# Altium PCB Prog_Adaptor.PcbDoc
Units mm, origin at the board's own origin, x right, y up, seen from the top; angles counter-clockwise.
Board outline 57.7 x 32.75 mm, 2 copper layers (Top Layer, Bottom Layer), stack 1.591 mm thick; 8 components, 10 nets, 55 pads, 15 vias.
Unrouted connection lines stored in the file: 3.
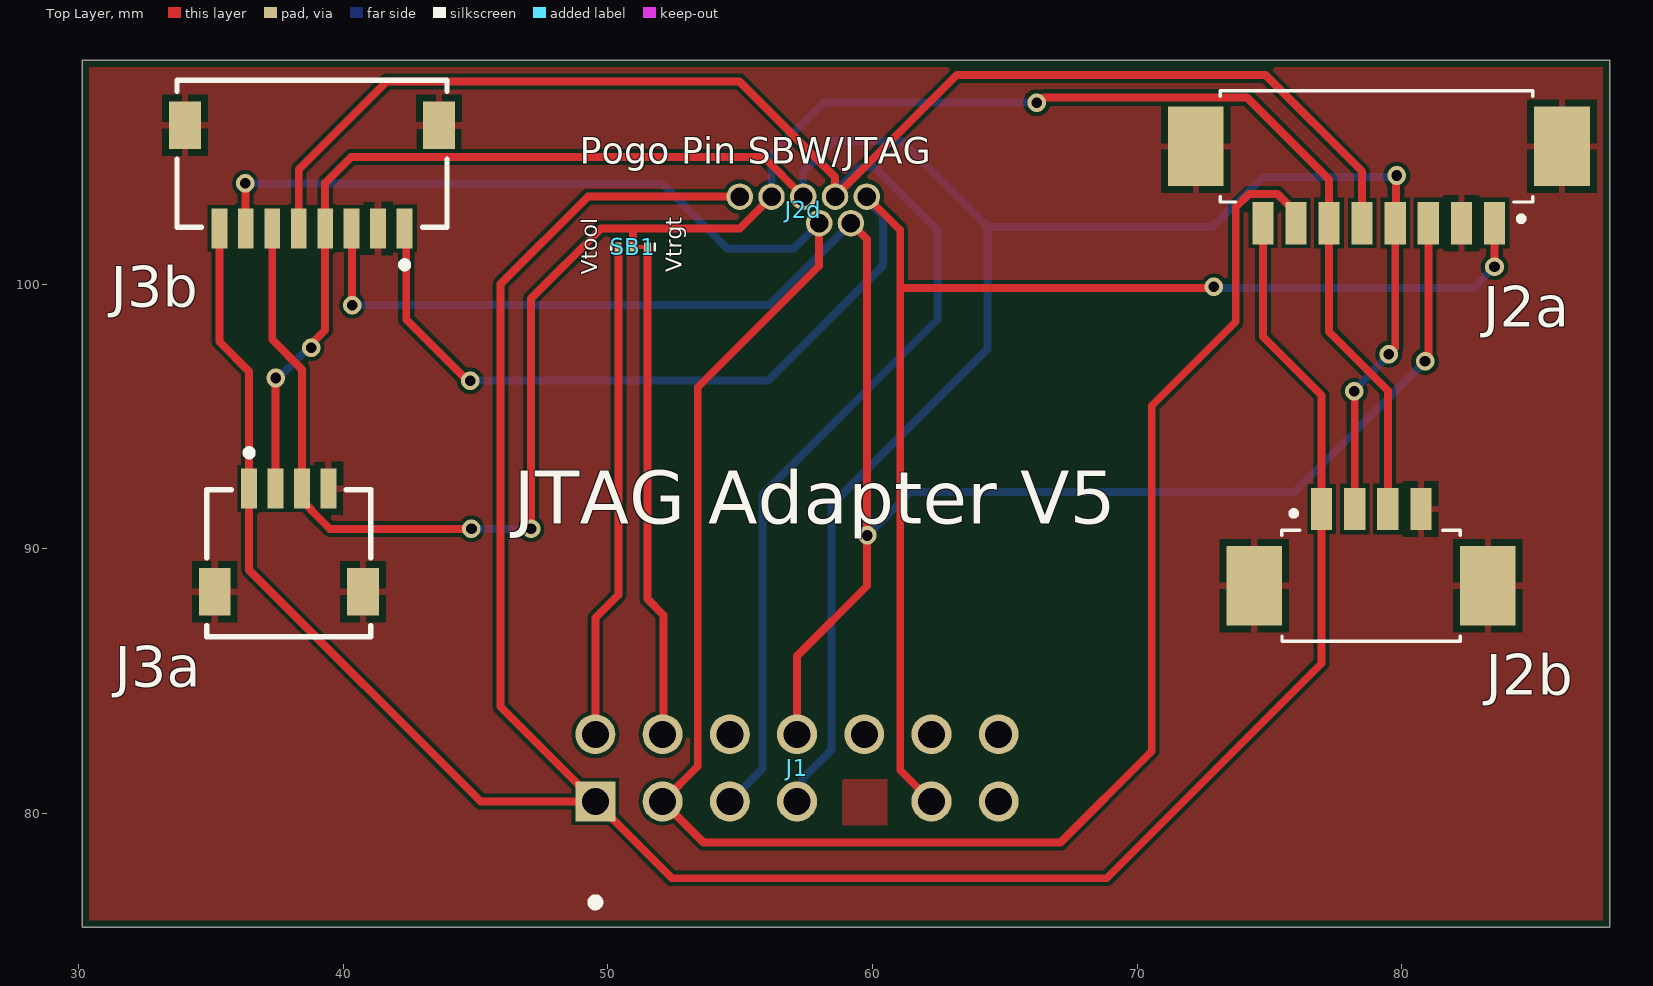
[diagram p0: Top Layer view]
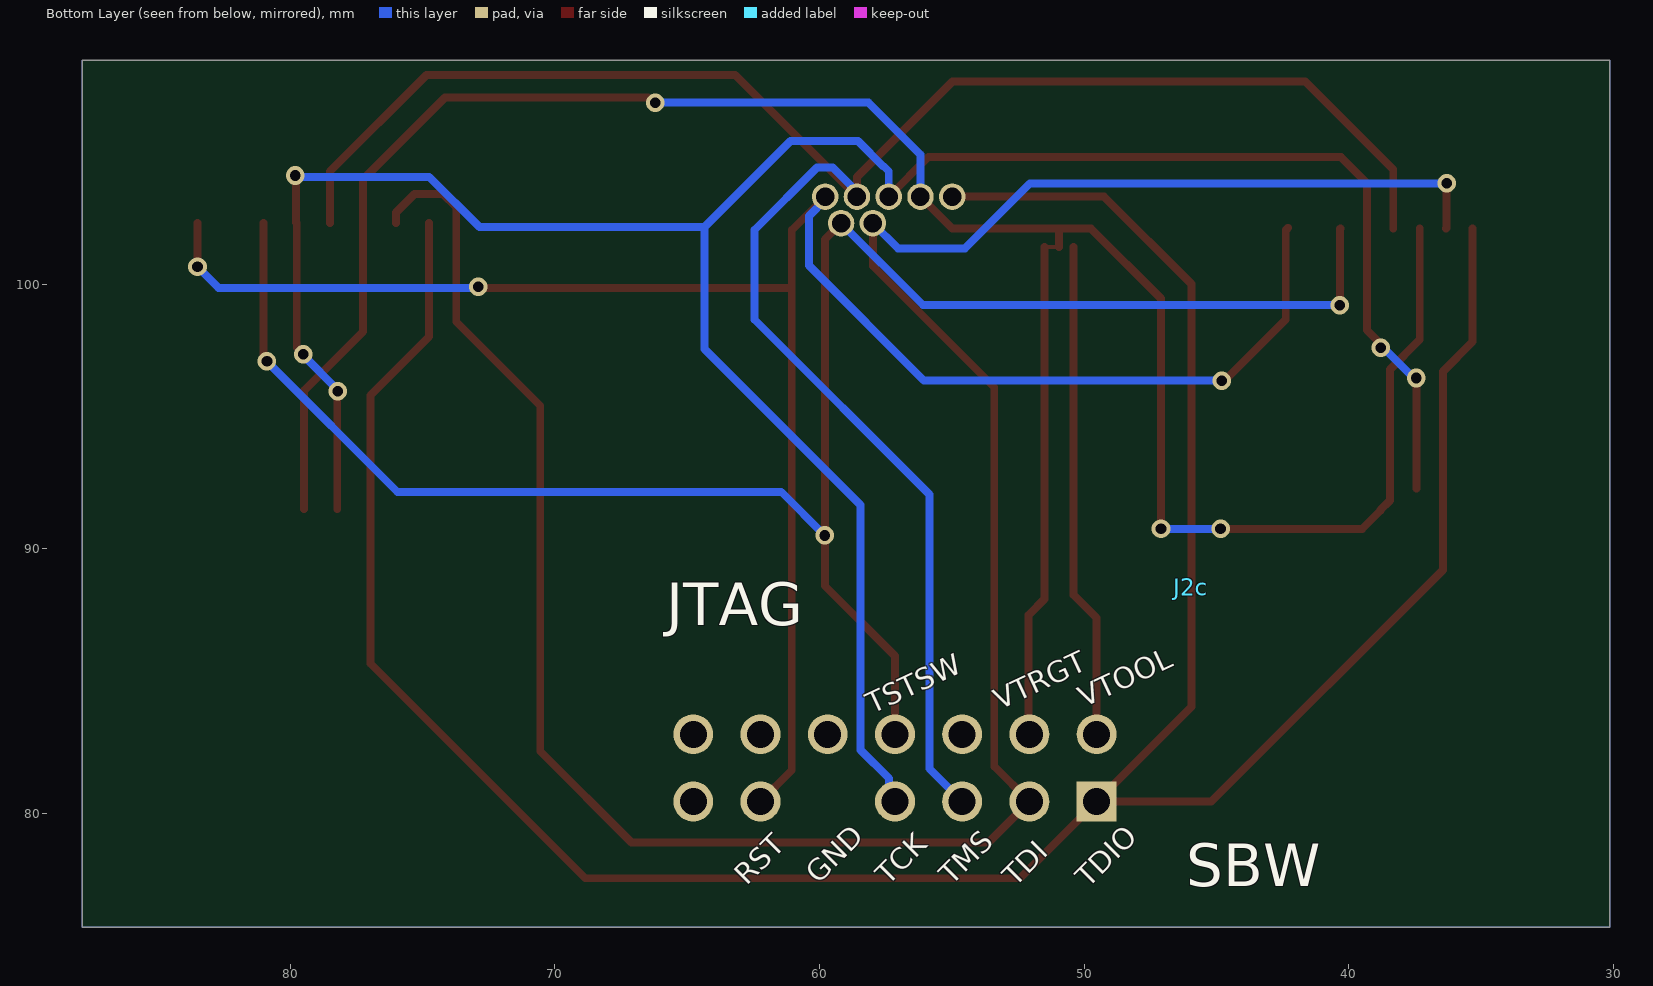
[diagram p1: Bottom Layer view, seen from below]
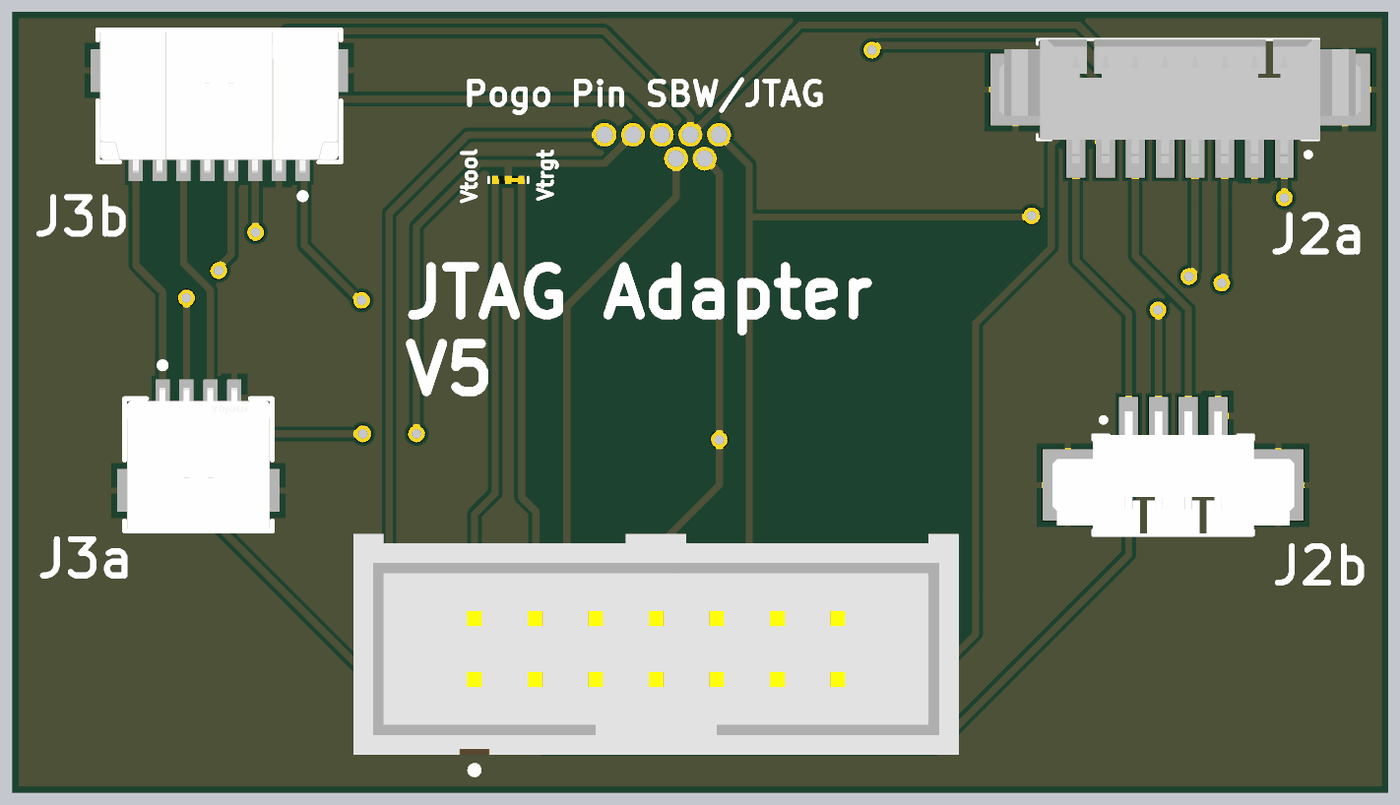
[diagram p2: 3D render of the assembled board from above, using the file's embedded part models]

## Layer stack, top to bottom
Top Solder: solder mask 0.0102, Solder Resist, Dk 3.5
Top Layer: signal copper 0.0356
Dielectric 1: dielectric 1.52, FR-4, Dk 4.8
Bottom Layer: signal copper 0.0356
Bottom Solder: solder mask 0.0102, Solder Resist, Dk 3.5

## Board outline
30.15,75.7 30.15,108.45 87.85,108.45 87.85,75.7

## Design rules (kind name [scope] priority, off if disabled: settings)
BoardOutlineClearance [All] p1: gap=0.254 ignorepadtopadclearanceinfootprint=FALSE except(0: Arc-SplitContinuation Track-SplitContinuation SMDPad-SplitContinuation THPad-SplitContinuation Via-SplitContinuation Fill-SplitContinuation Poly-SplitContinuation Region-SplitContinuation Text-SplitContinuation)
Clearance [All] p1: gap=0.152 ignorepadtopadclearanceinfootprint=FALSE except(0: Arc-Hole Track-Hole SMDPad-Hole THPad-Hole Via-Hole Fill-Hole Poly-Hole Region-Hole Text-Hole; 0.127: THPad-THPad Via-Via)
HoleSize [All] p1: absolutevalues=TRUE maxlimit=6.2 minlimit=0.3 maxpercent=80.000 minpercent=20.000
MinimumAnnularRing [All] p1: minimumring=0.15
MinimumSolderMaskSliver [All] p1: minsoldermaskwidth=0.1
PolygonConnect ViaConnect [IsVia] p1: connectstyle=Direct reliefconductorwidth=0.254 reliefentries=4 polygonreliefangle="90 Angle" airgapwidth=0.254
PolygonConnect [All] p2: connectstyle=Relief reliefconductorwidth=0.254 reliefentries=4 polygonreliefangle="90 Angle" airgapwidth=0.254
RoutingVias [All] p1: holewidth=0.3 width=0.6 viastyle="Through Hole" minholewidth=0.3 minwidth=0.5 maxholewidth=1 maxwidth=5
SilkToSilkClearance [All] p1: silktosilkclearance=0.1
SilkToSolderMaskClearance [IsPad] p1: minsilkscreentomaskgap=0.1 clearancetoexposedcopper=TRUE
SolderMaskExpansion [All] p1: expansion=0.051 istentingtop=FALSE
SupplyNets "Schematic Supply Nets_1" [InNet('GND')] p1: voltage=0.000
SupplyNets "Schematic Supply Nets" [InNet('3v3')] p2: voltage=0.000
Width [All] p1: maxlimit=25.4 minlimit=0.15 preferedwidth=0.3
26 further rules are at their usual default settings.

## Classes and differential pairs
component class Prog_Adaptor: J1 J2a J2b J2c J2d J3a SB1

## Components (designator, comment, footprint, x,y, rotation, side; value= is the part's Value field where it differs from the comment)
J1 "SBH11-PBPC-D07-ST-BK" SBH11-PBPC-D07-ST-BK 57.15,81.72 r0 top
J2a "0532610871" MOLEX_0532610871 79.125,105.2 r180 top
J2b "0532610471" MOLEX_0532610471 78.845,88.6 r0 top
J2c "Header 4" HDR1X4 45.97,88.55 r0 bottom
J2d "*" POGO_8_PIN_HEADER 57.386,102.8 r0 top
J3a "501568-0407" FP-501568-0407-MFG 37.95,89.45 r0 top
J3b "501568-0807" FP-501568-0807-MFG 38.825,104.925 r180 top
SB1 "Solder Jumper 3-pin Left connected 0201" "Solder Bridge 3-pin Left shorted 0201" 50.95,101.4 r180 top net-tie

## Footprints (in the part's own frame and the unit in brackets; to place one, negate y for a bottom-side part, rotate by r counter-clockwise, add the part's x,y. Pads: shape width x height; smd on the part's side, far side on the other; paste and mask are expansions set on the pad)
FP-501568-0407-MFG [mm]
  rect 0.6x1.5 smd paste+0 mask+0: 1(-1.5,2.825) 2(-0.5,2.825) 3(0.5,2.825) 4(1.5,2.825)
  rect 1.2x1.8 smd paste+0 mask+0: 5(-2.8,-1.075) 6(2.8,-1.075)
  silkscreen extent -3.1,-2.78 3.1,4.3, body extent -3.5,-2.88 3.5,3.67, height 0.25
FP-501568-0807-MFG [mm]
  rect 0.6x1.5 smd paste+0 mask+0: 1(-3.5,2.825) 2(-2.5,2.825) 3(-1.5,2.825) 4(-0.5,2.825) 5(0.5,2.825) 6(1.5,2.825) 7(2.5,2.825) 8(3.5,2.825)
  rect 1.2x1.8 smd paste+0 mask+0: 9(-4.8,-1.075) 10(4.8,-1.075)
  silkscreen extent -5.1,-2.78 5.1,4.32, body extent -5.5,-2.88 5.5,3.67, height 0.25
HDR1X4 [mm] "Connector; Header; 4 Position"
MOLEX_0532610471 [mm] "Header - Picoblade 04-pin, SMT, RA, 3.4mm height"
  rect 0.8x1.6 smd mask+0.051: 1(-1.875,2.9) 2(-0.625,2.9) 3(0.625,2.9) 4(1.875,2.9)
  rect 2.1x3 smd mask+0.051: MP1(-4.425,0) MP2(4.405,0)
  silkscreen extent -3.38,-2.1 3.35,2.83, body extent -5.07,-2.1 5.07,3.1, height 3.4
MOLEX_0532610871 [mm] "Header - Picoblade 08-pin, SMT, RA, 3.4mm height"
  rect 0.8x1.6 smd mask+0.051: 1(-4.375,2.9) 2(-3.125,2.9) 3(-1.875,2.9) 4(-0.625,2.9) 5(0.625,2.9) 6(1.875,2.9) 7(3.125,2.9) 8(4.375,2.9)
  rect 2.1x3 smd mask+0.051: MP1(-6.925,0) MP2(6.905,0)
  silkscreen extent -5.83,-2.1 5.98,2.83, body extent -7.57,-2.1 7.58,3.1, height 3.42
POGO_8_PIN_HEADER [mm]
  round 1 hole 0.7 mask+0.033: 1(-2.4,0.5) 2(-1.2,0.5) 4(0,0.5) 5(0.6,-0.5) 6(1.2,0.5) 7(1.8,-0.5) 8(2.4,0.5)
SBH11-PBPC-D07-ST-BK [mm]
  rect 1.508x1.508 hole 1.02: 01(-7.62,-1.27)
  round 1.508 hole 1.02: 02(-7.62,1.27) 03(-5.08,-1.27) 04(-5.08,1.27) 05(-2.54,-1.27) 06(-2.54,1.27) 07(0,-1.27) 08(0,1.27) 10(2.54,1.27) 11(5.08,-1.27) 12(5.08,1.27) 13(7.62,-1.27) 14(7.62,1.27)
  silkscreen extent -7.72,-5.18 -7.52,-4.98, body extent -12.7,-4.44 12.7,4.83, height 8.89
"Solder Bridge 3-pin Left shorted 0201" [mm]
  rect 0.25x0.35 smd paste-100 mask+0: 1(0,0) 2(-0.55,0) 3(0.55,0)
  Top Layer lines w0.15: -0.05,0 -0.475,0
  silkscreen extent -0.82,-0.13 0.83,0.13

## Part data
J1: "14-pin JTAG Male Header"
J2a: "Header - Picoblade 08-pin, SMT, RA", Supplier 1 Part No.=WM7626CT-ND, MF Part No.=0532610871, Mounting Type="Surface Mount", Orientation="Right Angle", Pins=8, Pitch=1.25mm, Supplier 1=Digikey
J2b: "Header - Picoblade 04-pin, SMT, RA", Supplier 1 Part No.=WM7622CT-ND, MF Part No.=0532610471, Mounting Type="Surface Mount", Orientation="Right Angle", Pins=4, Pitch=1.25mm, Supplier 1=Digikey
J2c: "Header, 4-Pin", LatestRevisionDate=17-Jul-2002, LatestRevisionNote="Re-released for DXP Platform.", Publisher="Altium Limited"
J2d: library part "Headerless Pogo Holes 8-pin"
J3a: library part CMP-002-00077-1, "Board Connector, 4 Contact(s), 1 Row(s), Male, Right Angle, 0.039 inch Pitch, Crimp Terminal, Locking, Natural Insulator", Max Operating Temperature=85°C, Min Operating Temperature=-40°C, Connector Type="BOARD CONNECTOR", Mounting Technology=Cable, RoHS Compliant=Yes
J3b: library part CMP-002-00073-1, "Board Connector, 8 Contact(s), 1 Row(s), Male, Right Angle, 0.039 inch Pitch, Surface Mount Terminal, Locking, Natural Insulator", Max Operating Temperature=85°C, Min Operating Temperature=-40°C, Connector Type="BOARD CONNECTOR", Mounting Technology=Board, RoHS Compliant=Yes
SB1: library part "Solder Jumper 3-pin Normally Closed 0201", DEBUG=DEBUG

## Via types
v1: diameter 0.7, hole 0.4, Top Layer to Bottom Layer, 15 vias

## Nets (pads, with @x,y where several pads share a name; then routed paths per layer and width w, separated by ;. In a path a pad name is that pad's centre, name@x,y a point inside that pad or via, vN(x,y) a via of type N, cw(c..) or ccw(c..) an arc to the next point about the centre after c; other vN are vias at no path point)
3v3: J2a.6 J2b.3 J2d.2 J3a.3 J3b.6 SB1.1 | length 78.2
  Top Layer w0.3: J3b.6 37.325,97.901 38.45,96.776 J3a.3 38.45,91.825 38.813,91.462 38.813,91.435 39.497,90.75 v1(44.85,90.75) ; v1(47.1,90.75) 47.1,99.45 49.75,102.1 50.85,102.1 ; SB1.1 50.95,102 50.85,102.1 ; J2d.2 54.986,102.1 50.85,102.1 ; v1(66.2,106.85) 66.281,106.85 66.481,107.05 74.15,107.05 77.25,103.95 J2a.6 77.25,98.2 79.47,95.98 J2b.3
  Bottom Layer w0.3: v1(44.85,90.75) v1(47.1,90.75) ; J2d.2 56.186,104.886 58.15,106.85 v1(66.2,106.85)
GND: J2a.2 J2a.MP1 J2a.MP2 J2b.4 J2b.MP1 J2b.MP2 J3a.4 J3a.5 J3a.6 J3b.2 J3b.9 J3b.10
JTAG_TCK/SBW_TCK: J1.07 J2a.4 J2b.2 J2d.4 J3a.2 J3b.4 | length 95.1
  Top Layer w0.3: J3a.2 v1(37.45,96.45) ; v1(38.8,97.6) 38.8,97.735 39.325,98.26 J3b.4 39.325,103.815 40.307,104.798 55.888,104.798 J2d.4 ; v1(78.2,95.95) 78.22,95.93 J2b.2 ; v1(79.5,97.35) 79.75,97.6 J2a.4 79.775,102.325 79.775,104.075 v1(79.8,104.1)
  Bottom Layer w0.3: v1(37.45,96.45) 37.55,96.45 38.7,97.6 v1(38.8,97.6) ; J1.07@57.308,80.608 57.376,80.676 57.376,81.326 58.45,82.4 58.45,91.65 64.35,97.55 64.35,102.15 ; J2d.4 57.386,104.26 57.576,104.45 57.6,104.45 58.55,105.4 61.1,105.4 64.35,102.15 ; v1(78.2,95.95) 78.2,96 79.5,97.3 v1(79.5,97.35) ; v1@79.6,104.1 79.55,104.05 74.75,104.05 72.85,102.15 64.35,102.15
JTAG_TDI: J1.03 J2a.7 J2d.5 J3b.7 | length 94.7
  Top Layer w0.3: v1(36.3,103.8) 36.313,103.788 36.313,102.112 J3b.7 ; J2d.5 57.986,100.686 53.4,96.1 53.4,81.78 J1.03 53.62,78.9 67.1,78.9 70.55,82.35 70.55,95.4 73.725,98.575 73.725,102.903 74.225,103.402 75.298,103.402 76,102.7 J2a.7
  Bottom Layer w0.3: v1(36.3,103.8) 52.054,103.8 54.504,101.35 57.036,101.35 J2d.5
JTAG_TDO/SBW_TDIO: J1.01 J2a.8 J2b.1 J2d.1 J3a.1 J3b.8 | length 111.1
  Top Layer w0.3: J3b.8 35.325,97.825 36.45,96.7 J3a.1 36.45,89.2 45.2,80.45 J1.01 ; J2d.1 49.25,103.3 45.95,100 45.95,84.03 J1.01 ; J2a.8 74.75,98.01 76.97,95.79 J2b.1 76.97,85.67 68.85,77.55 52.43,77.55 J1.01
JTAG_TEST/SBW_TCK: J1.08 J2a.3 J2d.7 J3b.3 | length 72.8
  Top Layer w0.3: J3b.3 40.337,102.087 40.337,99.213 v1(40.35,99.2) ; J1.08 57.15,85.95 59.8,88.6 v1(59.8,90.5) 59.8,101.686 J2d.7 ; v1(80.875,97.075) 81,97.2 J2a.3
  Bottom Layer w0.3: v1(40.35,99.2) 56.086,99.2 J2d.7 ; v1(59.8,90.5) 61.45,92.15 75.95,92.15 v1(80.875,97.075)
JTAG_TMS: J1.05 J2a.5 J2d.6 J3b.5 | length 81.6
  Top Layer w0.3: J3b.5 38.325,104.325 41.65,107.65 54.977,107.65 58.585,104.042 58.585,103.301 J2d.6 63.186,107.9 74.85,107.9 78.5,104.25 J2a.5
  Bottom Layer w0.3: J1.05 55.85,81.69 55.85,92.05 62.45,98.65 62.45,102.05 60.1,104.4 59.5,104.4 58.586,103.486 J2d.6
Reset: J1.11 J2a.1 J2d.8 J3b.1 | length 75.5
  Top Layer w0.3: J3b.1@42.3,102.125 J3b.1 42.387,102.038 42.387,98.663 44.7,96.35 v1(44.8,96.35) ; J2d.8 61.05,102.036 61.05,99.85 ; J1.11 61.05,81.63 61.05,99.85 ; v1(72.9,99.9) 72.85,99.85 61.05,99.85 ; v1(83.5,100.65) J2a.1
  Bottom Layer w0.3: v1(44.8,96.35) 56.05,96.35 60.4,100.7 60.4,102.571 59.786,103.185 J2d.8 ; v1(72.9,99.9) 72.95,99.85 82.7,99.85 v1(83.5,100.65)
VccTarget: J1.04 SB1.2 | length 18.7
  Top Layer w0.3: SB1.2 51.5,88.1 52.1,87.5 52.1,83.02 J1.04
VccTool: J1.02 SB1.3 | length 18.8
  Top Layer w0.3: J1.02 49.53,87.38 50.4,88.25 SB1.3
pads on no net: J1.06 J1.10 J1.12 J1.13 J1.14

## Polygon pours and split planes (outlines as drawn)
GND on Top Layer "GND" (solid, remove dead copper, pour order 4): 30.15,108.45 30.15,75.7 87.85,75.7 87.85,108.45
GND on Top Layer "GND_L01_P000" (solid, pour order 0): 60.55,79.55 60.55,81.3 58.75,81.3 58.85,81.2 58.85,79.55
GND on Bottom Layer "GND" (solid, remove dead copper, pour order 8): 30.15,108.45 30.15,75.7 87.85,75.7 87.85,108.45

## Silkscreen, mask and mechanical layers (free items; w line width, h text height)
Top Overlay:
  text "Pogo Pin SBW/JTAG" at 48.95,104.55 h1
  text "Vtrgt" at 52.8,100.45 h0.6 r90
  text "Vtool" at 49.6,100.35 h0.6 r90
  text "JTAG Adapter V5" at 46.45,90.95 h2
Bottom Overlay:
  text "JTAG" at 65.8,87.1 h1.6
  text "VTOOL" at 50,84 h0.8 r335
  text "VTRGT" at 53.2,83.9 h0.8 r335
  text "TSTSW" at 58,83.75 h0.8 r335
  text "GND" at 60.05,77.3 h0.8 r315
  text "SBW" at 46.15,77.25 h1.6
  text "TMS" at 55,77.25 h0.8 r315
  text "TCK" at 57.4,77.25 h0.8 r315
  text "RST" at 62.75,77.25 h0.8 r315
  text "TDI" at 52.6,77.2 h0.8 r315
  text "TDIO" at 49.85,77.15 h0.8 r315